# Altium PCB boost_converter.PcbDoc
Units mil, origin at the board's own origin, x right, y up, seen from the top; angles counter-clockwise.
Board outline 1000 x 1000 mil, 2 copper layers (Top Layer, Bottom Layer); 14 components, 6 nets, 27 pads, 4 vias.
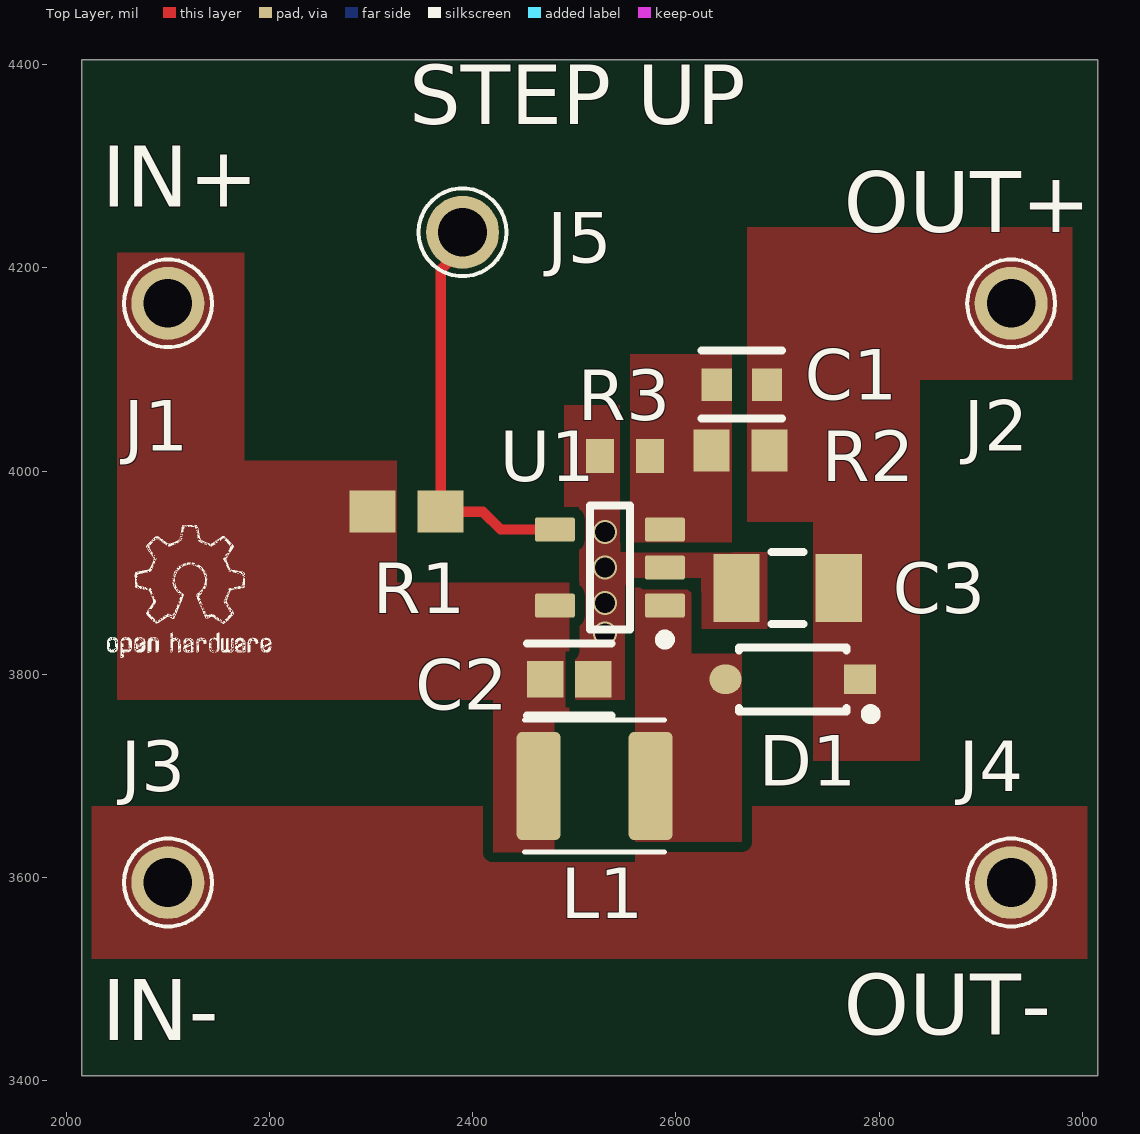
[diagram p0: Top Layer view]
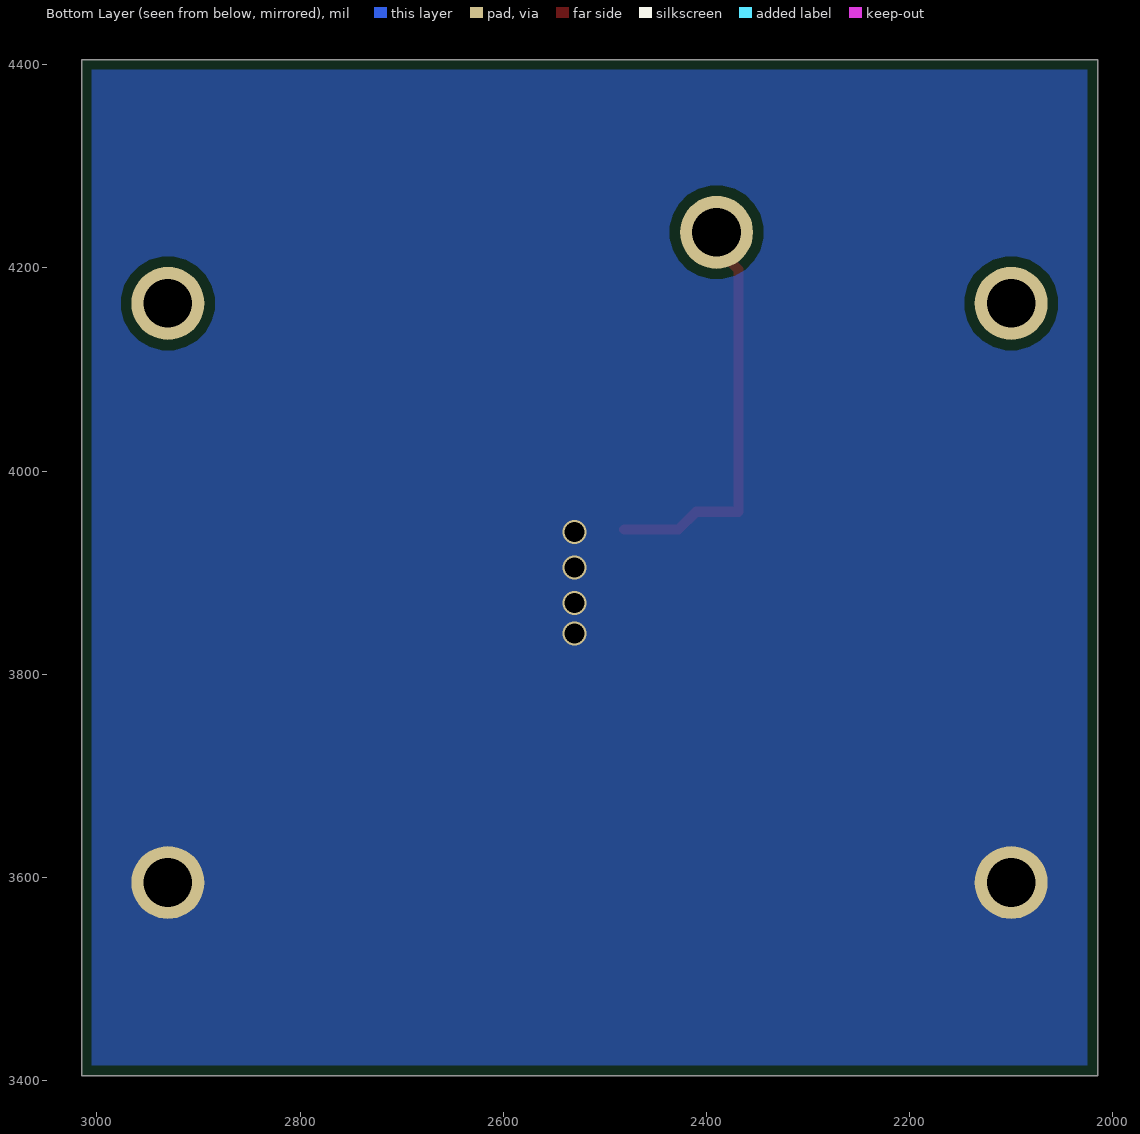
[diagram p1: Bottom Layer view, seen from below]
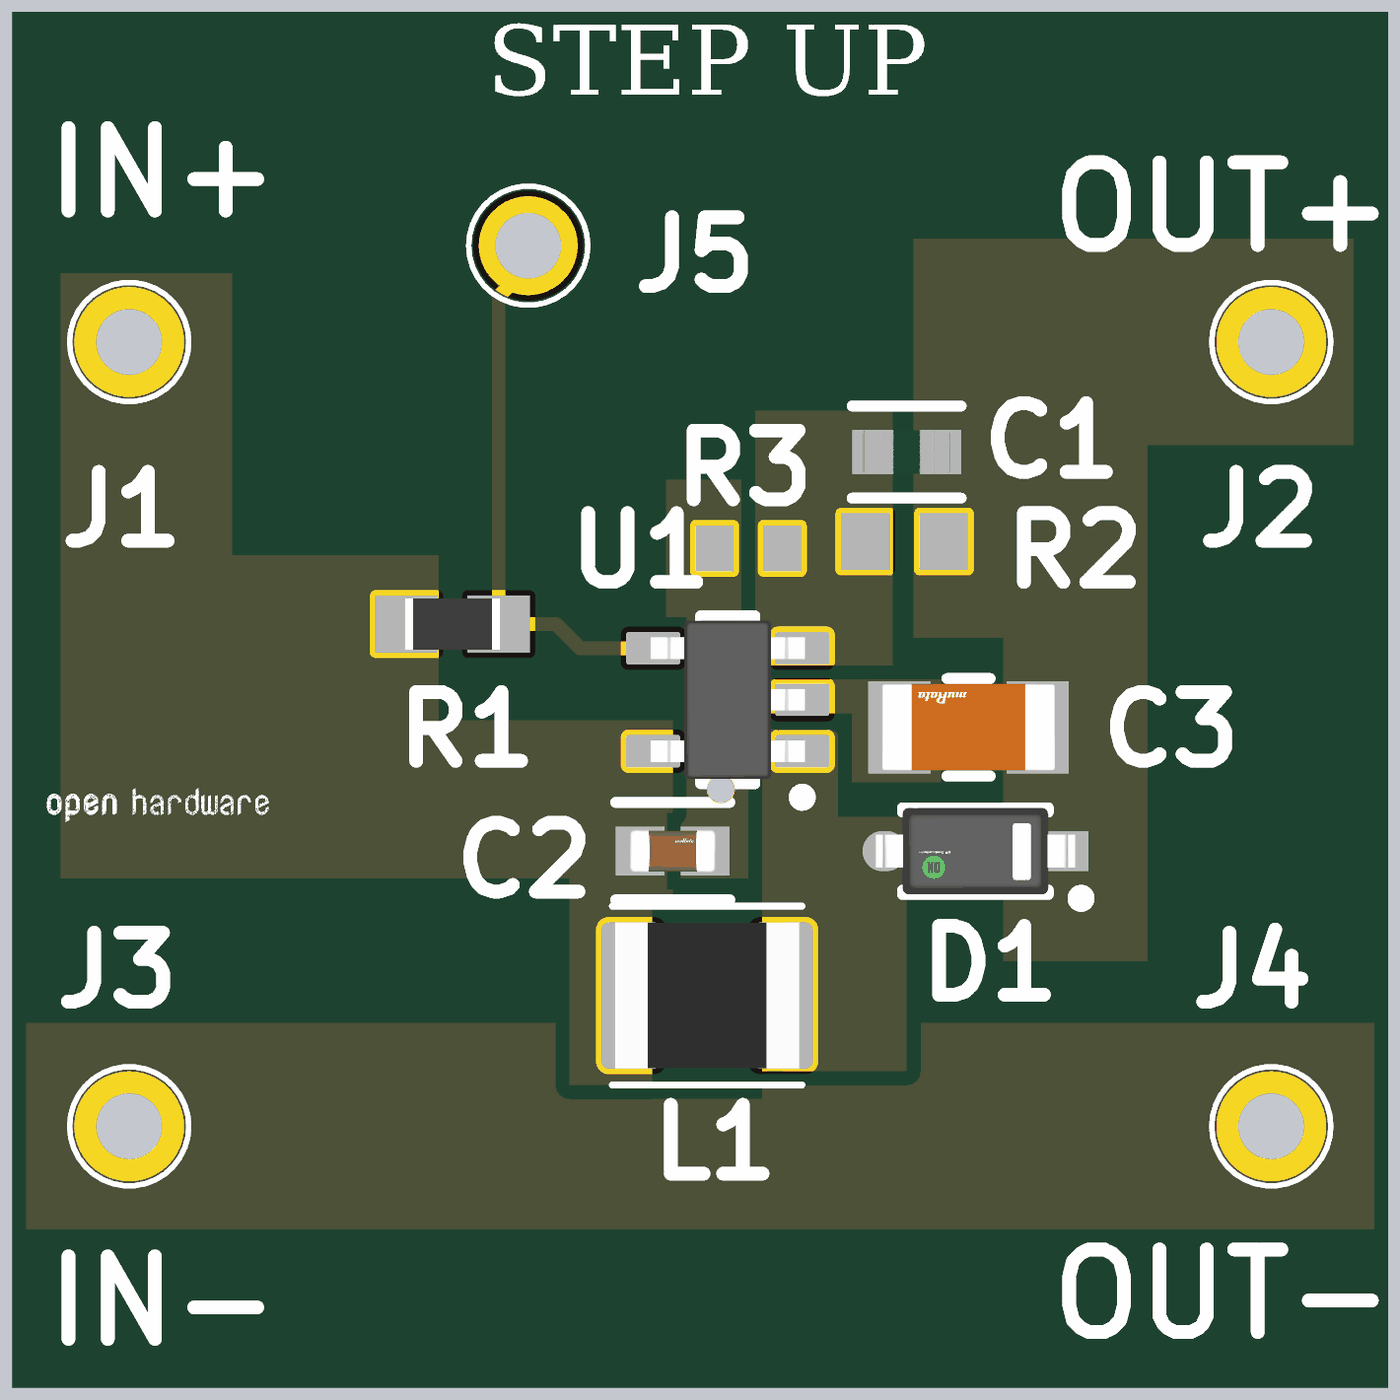
[diagram p2: 3D render of the assembled board from above, using the file's embedded part models]

## Layer stack, top to bottom
Top Solder: solder mask 0.4, Solder Resist, Dk 3.5
Top Layer: signal copper 1.4
Dielectric 1: dielectric 12.6, FR-4, Dk 4.8
Bottom Layer: signal copper 1.4
Bottom Solder: solder mask 0.4, Solder Resist, Dk 3.5

## Board outline
2015,3405 3015,3405 3015,4405 2015,4405

## Design rules (kind name [scope] priority, off if disabled: settings)
BoardOutlineClearance [All] p1: gap=10 ignorepadtopadclearanceinfootprint=FALSE except(0: Arc-SplitContinuation Track-SplitContinuation SMDPad-SplitContinuation THPad-SplitContinuation Via-SplitContinuation Fill-SplitContinuation Poly-SplitContinuation Region-SplitContinuation Text-SplitContinuation)
Clearance [All] p1: gap=10 ignorepadtopadclearanceinfootprint=FALSE except(0: Arc-Hole Track-Hole SMDPad-Hole THPad-Hole Via-Hole Fill-Hole Poly-Hole Region-Hole Text-Hole)
PlaneConnect [All] p1: planeconnectstyle=Direct reliefexpansion=20 reliefentries=4 reliefconductorwidth=10 reliefairgap=10
PolygonConnect [All] p1: connectstyle=Direct reliefconductorwidth=10 reliefentries=4 polygonreliefangle="90 Angle" airgapwidth=10
RoutingVias [All] p1: holewidth=28 width=50 viastyle="Through Hole" minholewidth=28 minwidth=50 maxholewidth=28 maxwidth=50
SolderMaskExpansion [All] p1: expansion=4 istentingtop=FALSE
Width [All] p1: maxlimit=10 minlimit=10 preferedwidth=10
29 further rules are at their usual default settings.

## Components (designator, comment, footprint, x,y, rotation, side; value= is the part's Value field where it differs from the comment)
C1 "220pF" FP-CL10-IPC_C 2665,4085 r180 top
C2 "2.2uF" FP-GRM188-0_2-IPC_C 2495,3795 r0 top
C3 "4.7uF" FP-GRM31C-0_2-e0_3_0_8-IPC_C 2710,3885 r180 top
D1 "MBR0520LT1G" FP-425-04-IPC_C 2715,3795 r180 top
J1 "4658-0-00-80-00-00-08-0" 4658000800000080 2100,4165 r0 top
J2 "4658-0-00-80-00-00-08-0" 4658000800000080 2930,4165 r0 top
J3 "4658-0-00-80-00-00-08-0" 4658000800000080 2100,3595 r0 top
J4 "4658-0-00-80-00-00-08-0" 4658000800000080 2930,3595 r0 top
J5 "4658-0-00-80-00-00-08-0" 4658000800000080 2390,4235 r0 top
L1 "10µ" INDC3225X250N 2520,3690 r0 top
R1 "47K" RESC1608X55X30ML15T15#1 2335,3960 r180 top
R2 "115K" RESC1608X55X30ML15T15#2 2663.54,4020 r0 top
R3 "13.3K" RESC1608X55X30LL15T15 2550,4015 r0 top
U1 "LM2731YMF/NOPB" DBV0005A_N 2535,3905 r180 top

## Footprints (in the part's own frame and the unit in brackets; to place one, negate y for a bottom-side part, rotate by r counter-clockwise, add the part's x,y. Pads: shape width x height; smd on the part's side, far side on the other; paste and mask are expansions set on the pad)
4658000800000080 [mil]
  round 71.81 hole 47.87: 1(0,0)
  silkscreen extent -43,-43 43,43, body extent -35,-35 35,35, height 117
DBV0005A_N [mm] "SOT23, 5-Leads, Body 3.05x1.75mm, Pitch 0.95mm, IPC Medium Density"
  rrect17% 1x0.6 smd: 1(-1.375,0.95) 2(-1.375,0) 3(-1.375,-0.95) 4(1.375,-0.95) 5(1.375,0.95)
  silkscreen extent -1.5,-1.55 0.5,1.92, body extent -1.42,-1.46 1.42,1.46, height 1.08
FP-425-04-IPC_C [mm]
  rect 0.808x0.742 smd paste+0 mask+0: 1(-1.68,0)
  rrect100% 0.808x0.742 smd paste+0 mask+0: 2(1.68,0)
  silkscreen extent -2.07,-0.8 1.35,1, body extent -2.18,-0.9 2.18,0.9, height 0.25
FP-CL10-IPC_C [mil]
  rect 29.85x31.97 smd paste+0 mask+0: 1(-24.68,0) 2(24.68,0)
  silkscreen extent -40,-33 40,33, body extent -44,-22 44,22, height 10
FP-GRM31C-0_2-e0_3_0_8-IPC_C [mil]
  rect 45.46x67.17 smd paste+0 mask+0: 1(-50.23,0) 2(50.23,0)
  silkscreen extent -16,-35 16,35, body extent -77,-39 77,39, height 10
FP-GRM188-0_2-IPC_C [mil]
  rect 35.63x35.68 smd paste+0 mask+0: 1(-23.64,0) 2(23.64,0)
  silkscreen extent -41,-35 41,35, body extent -45,-24 45,24, height 10
INDC3225X250N [mm] "Chip Inductor, 2-Leads, Body 3.2x2.5mm, IPC Medium Density"
  round 0.508 on Mech15: 0(0,0)
  rrect25% 1.1x2.7 smd: 1(-1.4,0) 2(1.4,0)
  silkscreen extent -1.75,-1.65 1.75,1.65, body extent -1.7,-1.35 1.7,1.35, height 2.7
RESC1608X55X30LL15T15 [mm] "Chip Resistor, 2-Leads, Body 1.60x0.80mm, IPC High Density"
  rect 0.7x0.85 smd: 1(-0.625,0) 2(0.625,0)
  body extent -0.87,-0.48 0.87,0.48, height 0.55
RESC1608X55X30ML15T15#1 [mm] "Chip Resistor, 2-Leads, Body 1.75x0.95mm, IPC Low Density"
  rect 1.15x1.05 smd: 1(-0.85,0) 2(0.85,0)
  body extent -0.87,-0.48 0.87,0.48, height 0.55
RESC1608X55X30ML15T15#2 [mm] "Chip Resistor, 2-Leads, Body 1.60x0.80mm, IPC Low Density"
  rect 0.9x1.05 smd: 1(-0.725,0) 2(0.725,0)
  body extent -0.87,-0.48 0.87,0.48, height 0.55

## Part data
C1: library part CMP-13271-002543-1, "Cap Ceramic 220pF 50V C0G ±5% Pad SMD 0603 +125°C T/R", Case Code (Imperial)=0603, Case Code (Metric)=1608, Dielectric=C0G, Max Operating Temperature=125°C, Min Operating Temperature=-55°C, Package Quantity=1, Temperature Coefficient=300ppm/°C, Tolerance=5%, Voltage=50V, Capacitance=220pF, Case/Package=0603, Contact Plating=Tin, Depth=0.8mm, Height=0.8mm, Lead Free="Lead Free", Length=1.6mm, Material=Ceramic, Mount="Surface Mount", Packaging="Tape and Reel", Radiation Hardening=No, Thickness=0.035inch, Voltage Rating=50V, Voltage Rating (DC)=50V, Width=0.031inch
C2: library part CMP-06035-042125-1, "Chip Multilayer Ceramic Capacitors for General Purpose, 0603, 2.2uF, X5R, 15%, 10%, 50V", Case Code (Imperial)=0603, Case Code (Metric)=1608, Dielectric=X5R, Max Operating Temperature=85°C, Min Operating Temperature=-55°C, Tolerance=10%, Voltage Rating=50V, Capacitance=2.2uF, Case/Package=0603, Height=0.8mm, Length=0.063inch, Material=Ceramic, Mount="Surface Mount", Packaging="Cut Tape", REACH SVHC="No SVHC", Thickness=0.039inch, Voltage Rating (DC)=50V, Width=0.031inch
C3: library part CMP-1037-04923-3, "Chip Multilayer Ceramic Capacitors for General Purpose, 1206, 4.7uF, X7R, 15%, 10%, 50V", Case Code (Imperial)=1206, Case Code (Metric)=3216, Dielectric=X7R, Max Operating Temperature=125°C, Min Operating Temperature=-55°C, Package Quantity=2000, Tolerance=10%, Voltage=50V, Capacitance=4.7uF, Case/Package=1206, Depth=1.6mm, Height=1.6mm, Lead Free="Lead Free", Length=3.2mm, Material=Ceramic, Mount="Surface Mount", Packaging="Tape and Reel", Radiation Hardening=No, REACH SVHC="No SVHC", Termination=SMD/SMT, Thickness=0.071inch, Voltage Rating=50V, Voltage Rating (DC)=50V, Width=0.063inch
D1: library part CMP-1055-00425-2, "DIODE SCHOTTKY 20V 500MA SOD123", Average Rectified Current=500mA, Case/Package=SOD-123-2, Forward Voltage=385mV, Max Forward Surge Current (Ifsm)=5.5A, Max Operating Temperature=125°C, Max Repetitive Reverse Voltage (Vrrm)=20V, Max Reverse Leakage Current=250uA, Min Operating Temperature=-65°C, Package Quantity=3000, Contact Plating=Tin, Current Rating=500mA, Element Configuration=Single, Forward Current=500mA, Height=1.12mm, Lead Free="Lead Free", Length=2.69mm, Max Reverse Voltage (DC)=20V, Max Surge Current=5.5A, Number of Pins=2, Output Current=500mA, Packaging="Tape and Reel", Peak Non-Repetitive Surge Current=5.5A, Peak Reverse Current=250uA, Polarity=Standard, Radiation Hardening=No, REACH SVHC="No SVHC", Termination=SMD/SMT, Voltage Rating (DC)=20V, Width=1.6mm
J1 J2 J3 J4 J5: "Connector", Manufacturer_Name=Mill-Max, Mouser Part Number=575-4658000800000080, Datasheet Link=https://www.mouser.com/datasheet/2/273/223.3-1143706.pdf, Height=2.8702mm, Manufacturer_Part_Number=4658-0-00-80-00-00-08-0, Mouser Price/Stock=https://www.mouser.com/Search/Refine.aspx?Keyword=575-4658000800000080
L1: library part INDC_10u_LowRDC, "Inductor SMD Low DCR 10 µH 900mA 20% 1210", Current=900mA, DC Resistance (DCR)="172.9 mOhm Max", Frequency - Self Resonant=23MHz, Frequency - Test=100kHz, Manufacturer 1="Taiyo Yuden", Manufacturer Part Number 1=CBC3225T100MR, Operating Temperature="-40°C ~ 105°C", Package / Case="1210 (3225 Metric)", Ratings="900 mA; 133 mOhm", Supplier Part Number 1=587-1625-1-ND, Tolerance=±20%, Applications="Power Supplies", ComponentLink1Description=http://www.yuden.co.jp/ut/product/pdf/wound02_e.pdf, ComponentLink1URL=http://www.yuden.co.jp/ut/product/pdf/wound02_e.pdf, Current - Saturation=900mA, Current - Temperature Rise=900mA, SCDType=spec, Supplier 1=Digi-Key
R1: library part CMP-2000-00523-2, "Chip Resistor, 47 KOhm, +/- 1%, 0.1 W, -55 to 155 degC, 0603 (1608 Metric), RoHS, Tape and Reel", Case Code (Imperial)=0603, Case Code (Metric)=1608, Colour=Red, Forward Current="20 mA", Forward Voltage="2.1 V", Manufacturer Part Number=ERJ3EKF4702V, Max Operating Temperature="100 degC", Min Operating Temperature="-40 degC", Package Quantity=3000, Power Rating="90 mW", Case\Package=0603, ComponentLink1Description="Manufacturer URL", ComponentLink1URL=http://www.panasonic.com/, ComponentLink2Description=Datasheet, ComponentLink2URL=http://industrial.panasonic.com/cdbs/www-data/pdf/RDA0000/AOA0000C86.pdf, DatasheetVersion=Apr-15, Height="0.6 mm", Illumination Colour=Red, Length="1.6 mm", Lens Style=Clear, Luminous Intensity="63 mcd", Mount="Surface Mount", Nominal Vf="2.1 V", Nominal Wavelength="639 nm", Package=0603, PackageDescription="2-Pin Surface Mount Device, Body 1.6 x 0.85 mm", PackageReference=0603, Packaging="Tape and Reel", Pins=2, Radiation Hardening=No, REACH SVHC="No SVHC", Resistance=47K, RoHSCompliant=true, Viewing Angle="160 degrees", Width="0.8 mm"
R2: library part CMP-2000-00208-1, Manufacturer=Panasonic, Manufacturer Part Number=ERJ-3EKF1153V, Package=0603, Part Number=ERJ-3EKF1153V, Resistance=115K
R3: library part CMP-2000-00238-1, Manufacturer=Panasonic, Manufacturer Part Number=ERJ-3EKF1332V, Package=0603, Part Number=ERJ-3EKF1332V, Resistance=13.3K
U1: library part CMP-0069-01234-3, "0.6/1.6 MHz Boost Converters With 22V Internal FET Switch in 5-pin SOT-23, Pb-Free", Manufacturer="Texas Instruments", PackageTopMarking=S51B*XTT, PowerWise=N, ComponentLink1Description="Datasheet URL", ComponentLink1URL=http://www.ti.com/general/docs/lit/getliterature.tsp?genericPartNumber=LM2731&fileType=pdf, CompType=Switcher, PackageDescription="Molded SOT-23, .115 x .063 x .040 in Body, 5 Lead, .0375 in Pitch", PackageReference=DBV0005A, PinCount=5, RoHS=Y

## Via types
v1: diameter 23.62, hole 19.68, Top Layer to Bottom Layer, 4 vias

## Nets (pads, with @x,y where several pads share a name; then routed paths per layer and width w, separated by ;. In a path a pad name is that pad's centre, name@x,y a point inside that pad or via, vN(x,y) a via of type N, cw(c..) or ccw(c..) an arc to the next point about the centre after c; other vN are vias at no path point)
\S\H\D\N\: J5.1 R1.1 U1.4 | length 403.6
  Top Layer w10: J5.1 2390,4219.77 2368.46,4198.24 R1.1 2410,3960 2427.6,3942.4 U1.4
GND: C2.2 C3.2 J3.1 J4.1 R3.1 U1.2
  other v1: 2530,3840 2530,3870 2530,3905 2530,3940
NetC1_2: C1.2 R2.1 R3.2 U1.3
NetD1_2: D1.2 L1.2 U1.1
VIN: C2.1 J1.1 L1.1 R1.2 U1.5
VOUT: C1.1 C3.1 D1.1 J2.1 R2.2
pads on no net: L1.0

## Polygon pours and split planes (outlines as drawn)
GND on Top Layer "NONET_L-01_P-001" (solid, pour order 7): 2020,3670 3005,3670 3005,3520 2020,3520
VOUT on Top Layer "NONET_L-01_P-001" (solid, pour order 5): 2670,3950 2735,3950 2735,3715 2840,3715 2840,4090 2990,4090 2990,4240 2670,4240
VIN on Top Layer "NONET_L-01_P-001" (solid, pour order 4): 2050,4215 2050,3775 2430,3775 2430,3890 2325,3890 2325,4010 2175,4010 2175,4215
GND on Top Layer "NONET_L-01_P-001" (solid, pour order 3): 2500,3775 2555,3775 2555,3895 2625,3895 2625,3845 2690,3845 2690,3920 2545,3920 2545,4065 2490,4065 2490,3965 2505,3965 2505,3830 2500,3830
VIN on Top Layer "NONET_L-01_P-001" (solid, pour order 2): 2420,3625 2495,3625 2495,3890 2420,3890
NetD1_2 on Top Layer "NONET_L-01_P-001" (solid, pour order 1): 2560,3885 2560,3635 2665,3635 2665,3820 2615,3820 2615,3885
NetC1_2 on Top Layer "NONET_L-01_P-001" (solid, pour order 0): 2555,4115 2555,3930 2655,3930 2655,4115
GND on Bottom Layer "NONET_L-01_P-001" (solid, pour order 6): 2015,4405 3015,4405 3015,3405 2015,3405

## Other copper
Top Layer:
  pour cut-out: 2480,3615 2560,3615 2560,3760 2480,3760

## Silkscreen, mask and mechanical layers (free items; w line width, h text height)
Top Overlay:
  drawing of 13 lines, arcs and shapes, not listed
  text "OUT+" at 2025,4640.88 h100
  text "STEP UP" at 2337.3,4322.38 h100
  text "IN+" at 2035,4260 h60
  text "OUT+" at 2765,4235 h60
  text "OUT-" at 2765,3445 h60
  text "IN-" at 2035,3440 h60
Mechanical 1:
  the board outline again, w8